# EAGLE board USB_Panel (EAGLE 9.2.0)
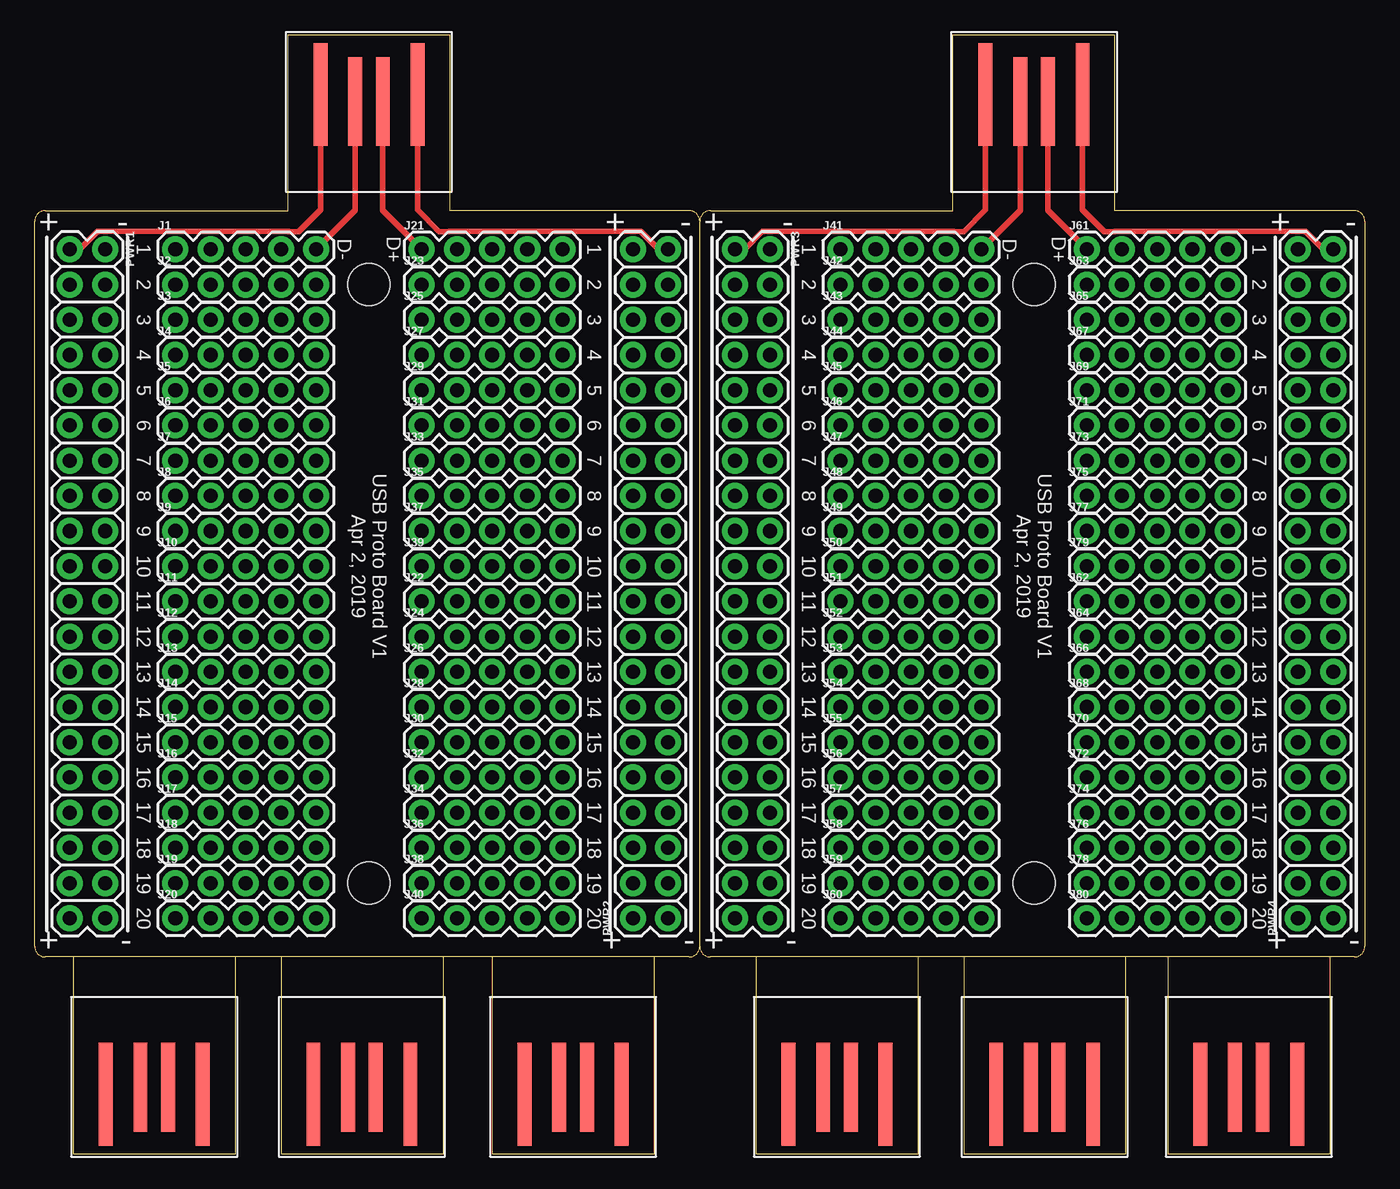
[diagram p0: board, top side]
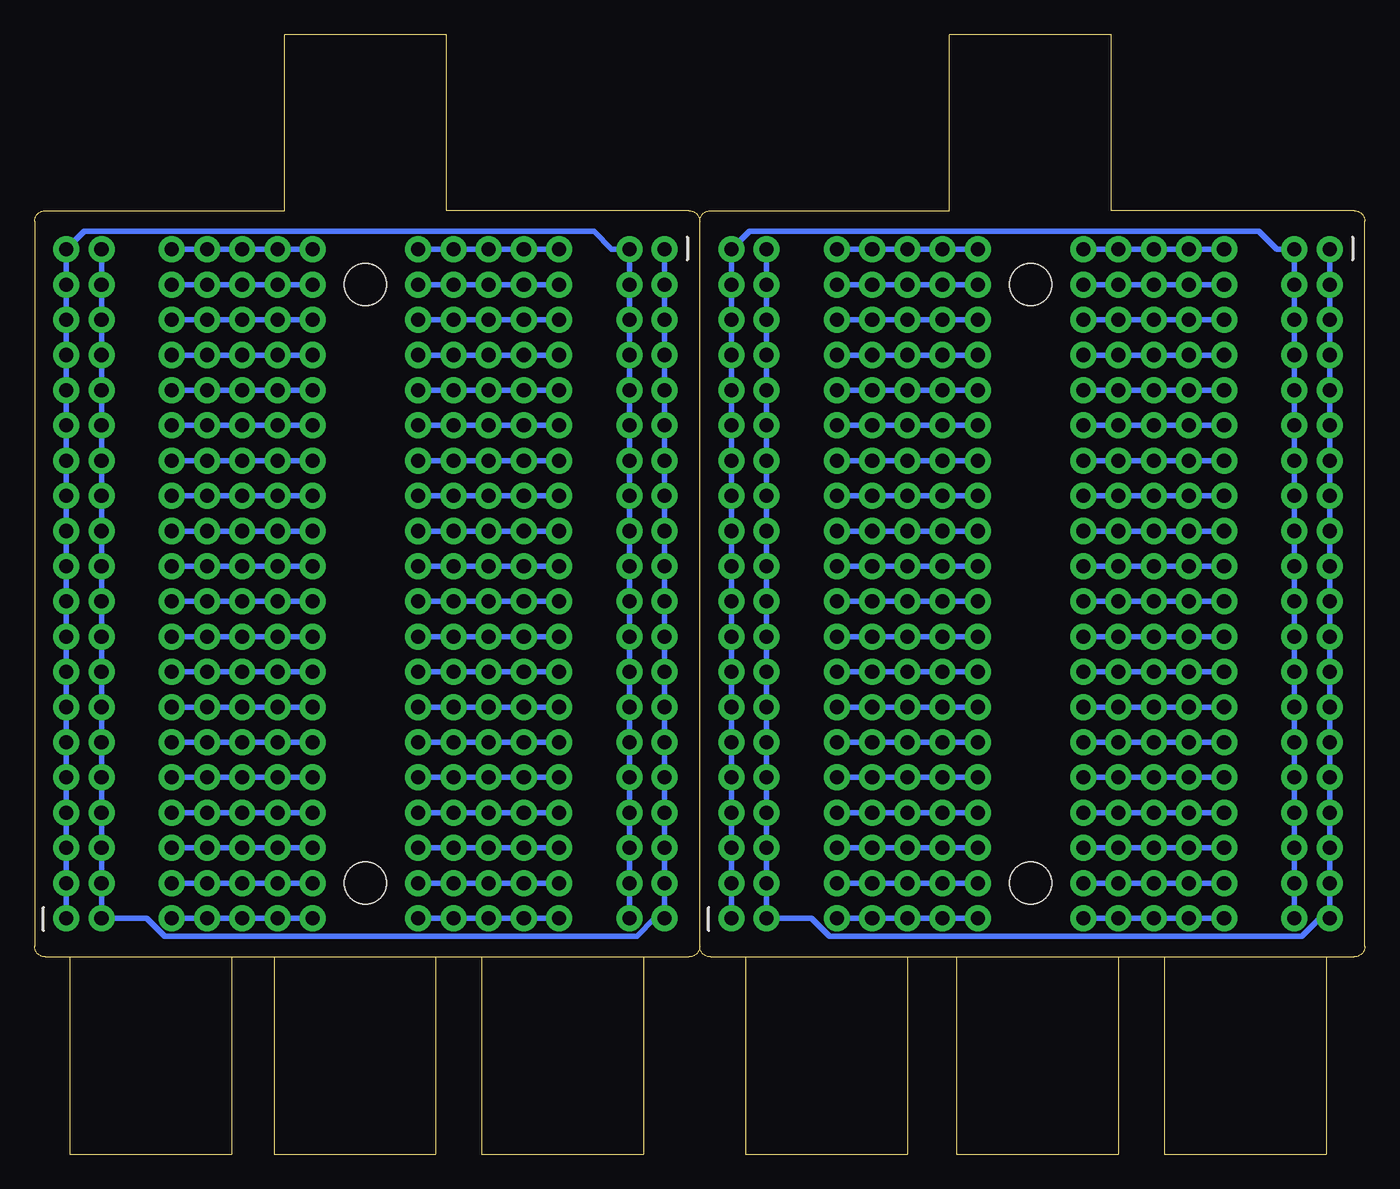
[diagram p1: board, bottom side, seen from below]

Size 96.01 x 80.77 mm. Coordinates in mm from the lower left corner, seen from the top.
Outline: 48.01,14.99 arc-90 47.24,14.22 0.76,14.22 arc-90 0,14.99 0,67.31 arc-90 0.76,68.07 18.29,68.07 18.29,80.77 29.97,80.77 29.97,68.07 47.24,68.07 arc-90 48.01,67.31
Outline: 48.01,67.31 arc-90 48.77,68.07 66.29,68.07 66.29,80.77 77.98,80.77 77.98,68.07 95.25,68.07 arc-90 96.01,67.31 96.01,14.99 arc-90 95.25,14.22 48.77,14.22 arc-90 48.01,14.99
Outline: 48.01,14.99 48.01,67.31
Outline: 14.48,14.22 14.48,0 2.79,0 2.79,14.22
Outline: 29.46,14.22 29.46,0 17.78,0 17.78,14.22
Outline: 44.7,14.22 44.7,0 33.02,0 33.02,14.22
Outline: 63.75,14.22 63.75,0 52.07,0 52.07,14.22
Outline: 78.74,14.22 78.74,0 67.06,0 67.06,14.22
Outline: 93.47,14.22 93.47,0 81.79,0 81.79,14.22
Copper layers (1*16): Top 0.035mm / dielectric 1.5mm / Bottom 0.035mm
Design rules "default *": minimum track width 16mil, minimum drill 0.35mm, track to track 16mil, track to pad 6mil, pad to pad 6mil, via to via 6mil, smd to smd 6mil, copper to edge 40mil, drill to drill 6mil, minimum pad ring 10mil, minimum via ring 8mil, stop-mask expansion 4mil, vias tented up to drill 0mil, thermal gap 10mil
Net classes: 1 power: width 0.178 mm
Holes 3.05 mm at 24.13,62.74 24.13,19.56 72.14,62.74 72.14,19.56

## Footprints (pad centres in the part's own frame; a part is rotated, then mirrored left to right if it is on the bottom)
1X05 = drill 1.016 pad 1.88: 1 0,0; 2 2.54,0; 3 5.08,0; 4 7.62,0; 5 10.16,0
2X20 = drill 1.016 pad 1.88: 1 0,0; 2 0,2.54; 3 2.54,0; 4 2.54,2.54; 5 5.08,0; 6 5.08,2.54; 7 7.62,0; 8 7.62,2.54; 9 10.16,0; 10 10.16,2.54; 11 12.7,0; 12 12.7,2.54; 13 15.24,0; 14 15.24,2.54; 15 17.78,0; 16 17.78,2.54; 17 20.32,0; 18 20.32,2.54; 19 22.86,0; 20 22.86,2.54; 21 25.4,0; 22 25.4,2.54; 23 27.94,0; 24 27.94,2.54; 25 30.48,0; 26 30.48,2.54; 27 33.02,0; 28 33.02,2.54; 29 35.56,0; 30 35.56,2.54; 31 38.1,0; 32 38.1,2.54; 33 40.64,0; 34 40.64,2.54; 35 43.18,0; 36 43.18,2.54; 37 45.72,0; 38 45.72,2.54; 39 48.26,0; 40 48.26,2.54
USB_ON_BOARD = smd 6.41 x 1: D+ 0,1; D- 0,-1 | smd 7.41 x 1: GND -0.5,3.5; VCC -0.5,-3.5

## Placement (x,y rotation side)
J1  [1X05]  10.16,65.28 0 top
J2  [1X05]  10.16,62.74 0 top
J3  [1X05]  10.16,60.2 0 top
J4  [1X05]  10.16,57.66 0 top
J5  [1X05]  10.16,55.12 0 top
J6  [1X05]  10.16,52.58 0 top
J7  [1X05]  10.16,50.04 0 top
J8  [1X05]  10.16,47.5 0 top
J9  [1X05]  10.16,44.96 0 top
J10  [1X05]  10.16,42.42 0 top
J11  [1X05]  10.16,39.88 0 top
J12  [1X05]  10.16,37.34 0 top
J13  [1X05]  10.16,34.8 0 top
J14  [1X05]  10.16,32.26 0 top
J15  [1X05]  10.16,29.72 0 top
J16  [1X05]  10.16,27.18 0 top
J17  [1X05]  10.16,24.64 0 top
J18  [1X05]  10.16,22.1 0 top
J19  [1X05]  10.16,19.56 0 top
J20  [1X05]  10.16,17.02 0 top
J21  [1X05]  27.94,65.28 0 top
J22  [1X05]  27.94,39.88 0 top
J23  [1X05]  27.94,62.74 0 top
J24  [1X05]  27.94,37.34 0 top
J25  [1X05]  27.94,60.2 0 top
J26  [1X05]  27.94,34.8 0 top
J27  [1X05]  27.94,57.66 0 top
J28  [1X05]  27.94,32.26 0 top
J29  [1X05]  27.94,55.12 0 top
J30  [1X05]  27.94,29.72 0 top
J31  [1X05]  27.94,52.58 0 top
J32  [1X05]  27.94,27.18 0 top
J33  [1X05]  27.94,50.04 0 top
J34  [1X05]  27.94,24.64 0 top
J35  [1X05]  27.94,47.5 0 top
J36  [1X05]  27.94,22.1 0 top
J37  [1X05]  27.94,44.96 0 top
J38  [1X05]  27.94,19.56 0 top
J39  [1X05]  27.94,42.42 0 top
J40  [1X05]  27.94,17.02 0 top
J41  [1X05]  58.17,65.28 0 top
J42  [1X05]  58.17,62.74 0 top
J43  [1X05]  58.17,60.2 0 top
J44  [1X05]  58.17,57.66 0 top
J45  [1X05]  58.17,55.12 0 top
J46  [1X05]  58.17,52.58 0 top
J47  [1X05]  58.17,50.04 0 top
J48  [1X05]  58.17,47.5 0 top
J49  [1X05]  58.17,44.96 0 top
J50  [1X05]  58.17,42.42 0 top
J51  [1X05]  58.17,39.88 0 top
J52  [1X05]  58.17,37.34 0 top
J53  [1X05]  58.17,34.8 0 top
J54  [1X05]  58.17,32.26 0 top
J55  [1X05]  58.17,29.72 0 top
J56  [1X05]  58.17,27.18 0 top
J57  [1X05]  58.17,24.64 0 top
J58  [1X05]  58.17,22.1 0 top
J59  [1X05]  58.17,19.56 0 top
J60  [1X05]  58.17,17.02 0 top
J61  [1X05]  75.95,65.28 0 top
J62  [1X05]  75.95,39.88 0 top
J63  [1X05]  75.95,62.74 0 top
J64  [1X05]  75.95,37.34 0 top
J65  [1X05]  75.95,60.2 0 top
J66  [1X05]  75.95,34.8 0 top
J67  [1X05]  75.95,57.66 0 top
J68  [1X05]  75.95,32.26 0 top
J69  [1X05]  75.95,55.12 0 top
J70  [1X05]  75.95,29.72 0 top
J71  [1X05]  75.95,52.58 0 top
J72  [1X05]  75.95,27.18 0 top
J73  [1X05]  75.95,50.04 0 top
J74  [1X05]  75.95,24.64 0 top
J75  [1X05]  75.95,47.5 0 top
J76  [1X05]  75.95,22.1 0 top
J77  [1X05]  75.95,44.96 0 top
J78  [1X05]  75.95,19.56 0 top
J79  [1X05]  75.95,42.42 0 top
J80  [1X05]  75.95,17.02 0 top
PWR1  CONN_20X2  [2X20]  2.54,65.28 270 top
PWR2  CONN_20X2  [2X20]  45.72,17.02 90 top
PWR3  CONN_20X2  [2X20]  50.55,65.28 270 top
PWR4  CONN_20X2  [2X20]  93.73,17.02 90 top
U$1  USB_ON_BOARD  [USB_ON_BOARD]  72.14,75.95 270 top
U$2  USB_ON_BOARD  [USB_ON_BOARD]  24.13,75.95 270 top
U$3  USB_ON_BOARD  [USB_ON_BOARD]  8.64,4.83 90 top
U$4  USB_ON_BOARD  [USB_ON_BOARD]  23.62,4.83 90 top
U$5  USB_ON_BOARD  [USB_ON_BOARD]  38.86,4.83 90 top
U$6  USB_ON_BOARD  [USB_ON_BOARD]  57.91,4.83 90 top
U$7  USB_ON_BOARD  [USB_ON_BOARD]  72.9,4.83 90 top
U$8  USB_ON_BOARD  [USB_ON_BOARD]  87.63,4.83 90 top

## Library data of the parts
J1-J80 PWR1-PWR4 = SparkFun-Connectors
U$1-U$8 = Scott-Connectors

## Nets
N$1: J1.1 J1.2 J1.3 J1.4 J1.5 U$2.D-
N$2: J2.1 J2.2 J2.3 J2.4 J2.5
N$3: J3.1 J3.2 J3.3 J3.4 J3.5
N$4: J4.1 J4.2 J4.3 J4.4 J4.5
N$5: J5.1 J5.2 J5.3 J5.4 J5.5
N$6: J6.1 J6.2 J6.3 J6.4 J6.5
N$7: J7.1 J7.2 J7.3 J7.4 J7.5
N$8: J8.1 J8.2 J8.3 J8.4 J8.5
N$9: J9.1 J9.2 J9.3 J9.4 J9.5
N$10: J10.1 J10.2 J10.3 J10.4 J10.5
N$11: J11.1 J11.2 J11.3 J11.4 J11.5
N$12: J12.1 J12.2 J12.3 J12.4 J12.5
N$13: J13.1 J13.2 J13.3 J13.4 J13.5
N$14: J14.1 J14.2 J14.3 J14.4 J14.5
N$15: J15.1 J15.2 J15.3 J15.4 J15.5
N$16: J16.1 J16.2 J16.3 J16.4 J16.5
N$17: J17.1 J17.2 J17.3 J17.4 J17.5
N$18: J18.1 J18.2 J18.3 J18.4 J18.5
N$19: J19.1 J19.2 J19.3 J19.4 J19.5
N$20: J20.1 J20.2 J20.3 J20.4 J20.5
N$21: J21.1 J21.2 J21.3 J21.4 J21.5 U$2.D+
N$22: J22.1 J22.2 J22.3 J22.4 J22.5
N$23: J23.1 J23.2 J23.3 J23.4 J23.5
N$24: J24.1 J24.2 J24.3 J24.4 J24.5
N$25: J25.1 J25.2 J25.3 J25.4 J25.5
N$26: J26.1 J26.2 J26.3 J26.4 J26.5
N$27: J27.1 J27.2 J27.3 J27.4 J27.5
N$28: J28.1 J28.2 J28.3 J28.4 J28.5
N$29: J29.1 J29.2 J29.3 J29.4 J29.5
N$30: J30.1 J30.2 J30.3 J30.4 J30.5
N$31: J31.1 J31.2 J31.3 J31.4 J31.5
N$32: J32.1 J32.2 J32.3 J32.4 J32.5
N$33: J33.1 J33.2 J33.3 J33.4 J33.5
N$34: J34.1 J34.2 J34.3 J34.4 J34.5
N$35: J35.1 J35.2 J35.3 J35.4 J35.5
N$36: J36.1 J36.2 J36.3 J36.4 J36.5
N$37: J37.1 J37.2 J37.3 J37.4 J37.5
N$38: J38.1 J38.2 J38.3 J38.4 J38.5
N$39: J39.1 J39.2 J39.3 J39.4 J39.5
N$40: J40.1 J40.2 J40.3 J40.4 J40.5
N$41: PWR1.1 PWR1.3 PWR1.5 PWR1.7 PWR1.9 PWR1.11 PWR1.13 PWR1.15 PWR1.17 PWR1.19 PWR1.21 PWR1.23 PWR1.25 PWR1.27 PWR1.29 PWR1.31 PWR1.33 PWR1.35 PWR1.37 PWR1.39 PWR2.2 PWR2.4 PWR2.6 PWR2.8 PWR2.10 PWR2.12 PWR2.14 PWR2.16 PWR2.18 PWR2.20 PWR2.22 PWR2.24 PWR2.26 PWR2.28 PWR2.30 PWR2.32 PWR2.34 PWR2.36 PWR2.38 PWR2.40 U$2.VCC
N$42: PWR1.2 PWR1.4 PWR1.6 PWR1.8 PWR1.10 PWR1.12 PWR1.14 PWR1.16 PWR1.18 PWR1.20 PWR1.22 PWR1.24 PWR1.26 PWR1.28 PWR1.30 PWR1.32 PWR1.34 PWR1.36 PWR1.38 PWR1.40 PWR2.1 PWR2.3 PWR2.5 PWR2.7 PWR2.9 PWR2.11 PWR2.13 PWR2.15 PWR2.17 PWR2.19 PWR2.21 PWR2.23 PWR2.25 PWR2.27 PWR2.29 PWR2.31 PWR2.33 PWR2.35 PWR2.37 PWR2.39 U$2.GND
N$43: J41.1 J41.2 J41.3 J41.4 J41.5 U$1.D-
N$44: J42.1 J42.2 J42.3 J42.4 J42.5
N$45: J43.1 J43.2 J43.3 J43.4 J43.5
N$46: J44.1 J44.2 J44.3 J44.4 J44.5
N$47: J45.1 J45.2 J45.3 J45.4 J45.5
N$48: J46.1 J46.2 J46.3 J46.4 J46.5
N$49: J47.1 J47.2 J47.3 J47.4 J47.5
N$50: J48.1 J48.2 J48.3 J48.4 J48.5
N$51: J49.1 J49.2 J49.3 J49.4 J49.5
N$52: J50.1 J50.2 J50.3 J50.4 J50.5
N$53: J51.1 J51.2 J51.3 J51.4 J51.5
N$54: J52.1 J52.2 J52.3 J52.4 J52.5
N$55: J53.1 J53.2 J53.3 J53.4 J53.5
N$56: J54.1 J54.2 J54.3 J54.4 J54.5
N$57: J55.1 J55.2 J55.3 J55.4 J55.5
N$58: J56.1 J56.2 J56.3 J56.4 J56.5
N$59: J57.1 J57.2 J57.3 J57.4 J57.5
N$60: J58.1 J58.2 J58.3 J58.4 J58.5
N$61: J59.1 J59.2 J59.3 J59.4 J59.5
N$62: J60.1 J60.2 J60.3 J60.4 J60.5
N$63: J61.1 J61.2 J61.3 J61.4 J61.5 U$1.D+
N$64: J62.1 J62.2 J62.3 J62.4 J62.5
N$65: J63.1 J63.2 J63.3 J63.4 J63.5
N$66: J64.1 J64.2 J64.3 J64.4 J64.5
N$67: J65.1 J65.2 J65.3 J65.4 J65.5
N$68: J66.1 J66.2 J66.3 J66.4 J66.5
N$69: J67.1 J67.2 J67.3 J67.4 J67.5
N$70: J68.1 J68.2 J68.3 J68.4 J68.5
N$71: J69.1 J69.2 J69.3 J69.4 J69.5
N$72: J70.1 J70.2 J70.3 J70.4 J70.5
N$73: J71.1 J71.2 J71.3 J71.4 J71.5
N$74: J72.1 J72.2 J72.3 J72.4 J72.5
N$75: J73.1 J73.2 J73.3 J73.4 J73.5
N$76: J74.1 J74.2 J74.3 J74.4 J74.5
N$77: J75.1 J75.2 J75.3 J75.4 J75.5
N$78: J76.1 J76.2 J76.3 J76.4 J76.5
N$79: J77.1 J77.2 J77.3 J77.4 J77.5
N$80: J78.1 J78.2 J78.3 J78.4 J78.5
N$81: J79.1 J79.2 J79.3 J79.4 J79.5
N$82: J80.1 J80.2 J80.3 J80.4 J80.5
N$83: PWR3.1 PWR3.3 PWR3.5 PWR3.7 PWR3.9 PWR3.11 PWR3.13 PWR3.15 PWR3.17 PWR3.19 PWR3.21 PWR3.23 PWR3.25 PWR3.27 PWR3.29 PWR3.31 PWR3.33 PWR3.35 PWR3.37 PWR3.39 PWR4.2 PWR4.4 PWR4.6 PWR4.8 PWR4.10 PWR4.12 PWR4.14 PWR4.16 PWR4.18 PWR4.20 PWR4.22 PWR4.24 PWR4.26 PWR4.28 PWR4.30 PWR4.32 PWR4.34 PWR4.36 PWR4.38 PWR4.40 U$1.VCC
N$84: PWR3.2 PWR3.4 PWR3.6 PWR3.8 PWR3.10 PWR3.12 PWR3.14 PWR3.16 PWR3.18 PWR3.20 PWR3.22 PWR3.24 PWR3.26 PWR3.28 PWR3.30 PWR3.32 PWR3.34 PWR3.36 PWR3.38 PWR3.40 PWR4.1 PWR4.3 PWR4.5 PWR4.7 PWR4.9 PWR4.11 PWR4.13 PWR4.15 PWR4.17 PWR4.19 PWR4.21 PWR4.23 PWR4.25 PWR4.27 PWR4.29 PWR4.31 PWR4.33 PWR4.35 PWR4.37 PWR4.39 U$1.GND

## Tracks (layer width: path | path; a pad name or v marks a point on that pad's centre or on a via)
N$1
  Top 0.406: U$2.D- 23.13,68.09 J1.5
  Bottom 0.406: J1.1 J1.2 J1.3 J1.4 J1.5
N$2
  Bottom 0.406: J2.1 J2.2 J2.3 J2.4 J2.5
N$3
  Bottom 0.406: J3.1 J3.2 J3.3 J3.4 J3.5
N$4
  Bottom 0.406: J4.1 J4.2 J4.3 J4.4 J4.5
N$5
  Bottom 0.406: J5.1 J5.2 J5.3 J5.4 J5.5
N$6
  Bottom 0.406: J6.1 J6.2 J6.3 J6.4 J6.5
N$7
  Bottom 0.406: J7.1 J7.2 J7.3 J7.4 J7.5
N$8
  Bottom 0.406: J8.1 J8.2 J8.3 J8.4 J8.5
N$9
  Bottom 0.406: J9.1 J9.2 J9.3 J9.4 J9.5
N$10
  Bottom 0.406: J10.1 J10.2 J10.3 J10.4 J10.5
N$11
  Bottom 0.406: J11.1 J11.2 J11.3 J11.4 J11.5
N$12
  Bottom 0.406: J12.1 J12.2 J12.3 J12.4 J12.5
N$13
  Bottom 0.406: J13.1 J13.2 J13.3 J13.4 J13.5
N$14
  Bottom 0.406: J14.1 J14.2 J14.3 J14.4 J14.5
N$15
  Bottom 0.406: J15.1 J15.2 J15.3 J15.4 J15.5
N$16
  Bottom 0.406: J16.1 J16.2 J16.3 J16.4 J16.5
N$17
  Bottom 0.406: J17.1 J17.2 J17.3 J17.4 J17.5
N$18
  Bottom 0.406: J18.1 J18.2 J18.3 J18.4 J18.5
N$19
  Bottom 0.406: J19.1 J19.2 J19.3 J19.4 J19.5
N$20
  Bottom 0.406: J20.1 J20.2 J20.3 J20.4 J20.5
N$21
  Top 0.406: U$2.D+ 25.13,68.09 J21.1
  Bottom 0.406: J21.1 J21.2 J21.3 J21.4 J21.5
N$22
  Bottom 0.406: J22.1 J22.2 J22.3 J22.4 J22.5
N$23
  Bottom 0.406: J23.1 J23.2 J23.3 J23.4 J23.5
N$24
  Bottom 0.406: J24.1 J24.2 J24.3 J24.4 J24.5
N$25
  Bottom 0.406: J25.1 J25.2 J25.3 J25.4 J25.5
N$26
  Bottom 0.406: J26.1 J26.2 J26.3 J26.4 J26.5
N$27
  Bottom 0.406: J27.1 J27.2 J27.3 J27.4 J27.5
N$28
  Bottom 0.406: J28.1 J28.2 J28.3 J28.4 J28.5
N$29
  Bottom 0.406: J29.1 J29.2 J29.3 J29.4 J29.5
N$30
  Bottom 0.406: J30.1 J30.2 J30.3 J30.4 J30.5
N$31
  Bottom 0.406: J31.1 J31.2 J31.3 J31.4 J31.5
N$32
  Bottom 0.406: J32.1 J32.2 J32.3 J32.4 J32.5
N$33
  Bottom 0.406: J33.1 J33.2 J33.3 J33.4 J33.5
N$34
  Bottom 0.406: J34.1 J34.2 J34.3 J34.4 J34.5
N$35
  Bottom 0.406: J35.1 J35.2 J35.3 J35.4 J35.5
N$36
  Bottom 0.406: J36.1 J36.2 J36.3 J36.4 J36.5
N$37
  Bottom 0.406: J37.1 J37.2 J37.3 J37.4 J37.5
N$38
  Bottom 0.406: J38.1 J38.2 J38.3 J38.4 J38.5
N$39
  Bottom 0.406: J39.1 J39.2 J39.3 J39.4 J39.5
N$40
  Bottom 0.406: J40.1 J40.2 J40.3 J40.4 J40.5
N$41
  Top 0.406: U$2.VCC 20.63,68.13 19.05,66.55 18.34,66.55 18.32,66.57 4.54,66.57 3.25,65.28 PWR1.1
  Bottom 0.406: PWR2.40 PWR2.38 PWR2.36 PWR2.34 PWR2.32 PWR2.30 PWR2.28 PWR2.26 PWR2.24 PWR2.22 PWR2.20 PWR2.18 PWR2.16 PWR2.14 PWR2.12 PWR2.10 PWR2.8 PWR2.6 PWR2.4 PWR2.2 39.93,17.02 38.64,15.72 4.54,15.72 3.25,17.02 PWR1.39 PWR1.37 PWR1.35 PWR1.33 PWR1.31 PWR1.29 PWR1.27 PWR1.25 PWR1.23 PWR1.21 PWR1.19 PWR1.17 PWR1.15 PWR1.13 PWR1.11 PWR1.9 PWR1.7 PWR1.5 PWR1.3 PWR1.1
N$42
  Top 0.406: U$2.GND 27.63,68.13 29.21,66.55 29.92,66.55 29.94,66.57 43.72,66.57 45.01,65.28 PWR2.39
  Bottom 0.406: PWR2.1 PWR2.3 PWR2.5 PWR2.7 PWR2.9 PWR2.11 PWR2.13 PWR2.15 PWR2.17 PWR2.19 PWR2.21 PWR2.23 PWR2.25 PWR2.27 PWR2.29 PWR2.31 PWR2.33 PWR2.35 PWR2.37 PWR2.39 44.43,66.57 7.64,66.57 6.35,65.28 PWR1.2 PWR1.4 PWR1.6 PWR1.8 PWR1.10 PWR1.12 PWR1.14 PWR1.16 PWR1.18 PWR1.20 PWR1.22 PWR1.24 PWR1.26 PWR1.28 PWR1.30 PWR1.32 PWR1.34 PWR1.36 PWR1.38 PWR1.40
N$43
  Top 0.406: U$1.D- 71.14,68.09 J41.5
  Bottom 0.406: J41.1 J41.2 J41.3 J41.4 J41.5
N$44
  Bottom 0.406: J42.1 J42.2 J42.3 J42.4 J42.5
N$45
  Bottom 0.406: J43.1 J43.2 J43.3 J43.4 J43.5
N$46
  Bottom 0.406: J44.1 J44.2 J44.3 J44.4 J44.5
N$47
  Bottom 0.406: J45.1 J45.2 J45.3 J45.4 J45.5
N$48
  Bottom 0.406: J46.1 J46.2 J46.3 J46.4 J46.5
N$49
  Bottom 0.406: J47.1 J47.2 J47.3 J47.4 J47.5
N$50
  Bottom 0.406: J48.1 J48.2 J48.3 J48.4 J48.5
N$51
  Bottom 0.406: J49.1 J49.2 J49.3 J49.4 J49.5
N$52
  Bottom 0.406: J50.1 J50.2 J50.3 J50.4 J50.5
N$53
  Bottom 0.406: J51.1 J51.2 J51.3 J51.4 J51.5
N$54
  Bottom 0.406: J52.1 J52.2 J52.3 J52.4 J52.5
N$55
  Bottom 0.406: J53.1 J53.2 J53.3 J53.4 J53.5
N$56
  Bottom 0.406: J54.1 J54.2 J54.3 J54.4 J54.5
N$57
  Bottom 0.406: J55.1 J55.2 J55.3 J55.4 J55.5
N$58
  Bottom 0.406: J56.1 J56.2 J56.3 J56.4 J56.5
N$59
  Bottom 0.406: J57.1 J57.2 J57.3 J57.4 J57.5
N$60
  Bottom 0.406: J58.1 J58.2 J58.3 J58.4 J58.5
N$61
  Bottom 0.406: J59.1 J59.2 J59.3 J59.4 J59.5
N$62
  Bottom 0.406: J60.1 J60.2 J60.3 J60.4 J60.5
N$63
  Top 0.406: U$1.D+ 73.14,68.09 J61.1
  Bottom 0.406: J61.1 J61.2 J61.3 J61.4 J61.5
N$64
  Bottom 0.406: J62.1 J62.2 J62.3 J62.4 J62.5
N$65
  Bottom 0.406: J63.1 J63.2 J63.3 J63.4 J63.5
N$66
  Bottom 0.406: J64.1 J64.2 J64.3 J64.4 J64.5
N$67
  Bottom 0.406: J65.1 J65.2 J65.3 J65.4 J65.5
N$68
  Bottom 0.406: J66.1 J66.2 J66.3 J66.4 J66.5
N$69
  Bottom 0.406: J67.1 J67.2 J67.3 J67.4 J67.5
N$70
  Bottom 0.406: J68.1 J68.2 J68.3 J68.4 J68.5
N$71
  Bottom 0.406: J69.1 J69.2 J69.3 J69.4 J69.5
N$72
  Bottom 0.406: J70.1 J70.2 J70.3 J70.4 J70.5
N$73
  Bottom 0.406: J71.1 J71.2 J71.3 J71.4 J71.5
N$74
  Bottom 0.406: J72.1 J72.2 J72.3 J72.4 J72.5
N$75
  Bottom 0.406: J73.1 J73.2 J73.3 J73.4 J73.5
N$76
  Bottom 0.406: J74.1 J74.2 J74.3 J74.4 J74.5
N$77
  Bottom 0.406: J75.1 J75.2 J75.3 J75.4 J75.5
N$78
  Bottom 0.406: J76.1 J76.2 J76.3 J76.4 J76.5
N$79
  Bottom 0.406: J77.1 J77.2 J77.3 J77.4 J77.5
N$80
  Bottom 0.406: J78.1 J78.2 J78.3 J78.4 J78.5
N$81
  Bottom 0.406: J79.1 J79.2 J79.3 J79.4 J79.5
N$82
  Bottom 0.406: J80.1 J80.2 J80.3 J80.4 J80.5
N$83
  Top 0.406: U$1.VCC 68.64,68.13 67.06,66.55 66.35,66.55 66.32,66.57 52.55,66.57 51.25,65.28 PWR3.1
  Bottom 0.406: PWR4.40 PWR4.38 PWR4.36 PWR4.34 PWR4.32 PWR4.30 PWR4.28 PWR4.26 PWR4.24 PWR4.22 PWR4.20 PWR4.18 PWR4.16 PWR4.14 PWR4.12 PWR4.10 PWR4.8 PWR4.6 PWR4.4 PWR4.2 87.94,17.02 86.64,15.72 52.55,15.72 51.25,17.02 PWR3.39 PWR3.37 PWR3.35 PWR3.33 PWR3.31 PWR3.29 PWR3.27 PWR3.25 PWR3.23 PWR3.21 PWR3.19 PWR3.17 PWR3.15 PWR3.13 PWR3.11 PWR3.9 PWR3.7 PWR3.5 PWR3.3 PWR3.1
N$84
  Top 0.406: U$1.GND 75.64,68.13 77.22,66.55 77.92,66.55 77.95,66.57 91.72,66.57 93.02,65.28 PWR4.39
  Bottom 0.406: PWR4.1 PWR4.3 PWR4.5 PWR4.7 PWR4.9 PWR4.11 PWR4.13 PWR4.15 PWR4.17 PWR4.19 PWR4.21 PWR4.23 PWR4.25 PWR4.27 PWR4.29 PWR4.31 PWR4.33 PWR4.35 PWR4.37 PWR4.39 92.43,66.57 55.65,66.57 54.36,65.28 PWR3.2 PWR3.4 PWR3.6 PWR3.8 PWR3.10 PWR3.12 PWR3.14 PWR3.16 PWR3.18 PWR3.20 PWR3.22 PWR3.24 PWR3.26 PWR3.28 PWR3.30 PWR3.32 PWR3.34 PWR3.36 PWR3.38 PWR3.40

## Text on the board
tPlace: + | - | + | - | + | - | + | - | 1 | D- | D+ | 1 | 1 | D- | D+ | 1 | 2 | 2 | 2 | 2 | 3 | 3 | 3 | 3 | 4 | 4 | 4 | 4 | 5 | 5 | 5 | 5 | 6 | 6 | 6 | 6 | 7 | 7 | 7 | 7 | 8 | 8 | 8 | 8 | 9 | 9 | 9 | 9 | 10 | USB Proto Board V1 / Apr 2, 2019 | 10 | 10 | USB Proto Board V1 / Apr 2, 2019 | 10 | 11 | 11 | 11 | 11 | 12 | 12 | 12 | 12 | 13 | 13 | 13 | 13 | 14 | 14 | 14 | 14 | 15 | 15 | 15 | 15 | 16 | 16 | 16 | 16 | 17 | 17 | 17 | 17 | 18 | 18 | 18 | 18 | 19 | 19 | 19 | 19 | 20 | 20 | 20 | 20 | + | - | + | - | + | - | + | -